# EAGLE board untitled (EAGLE 9.0.1)
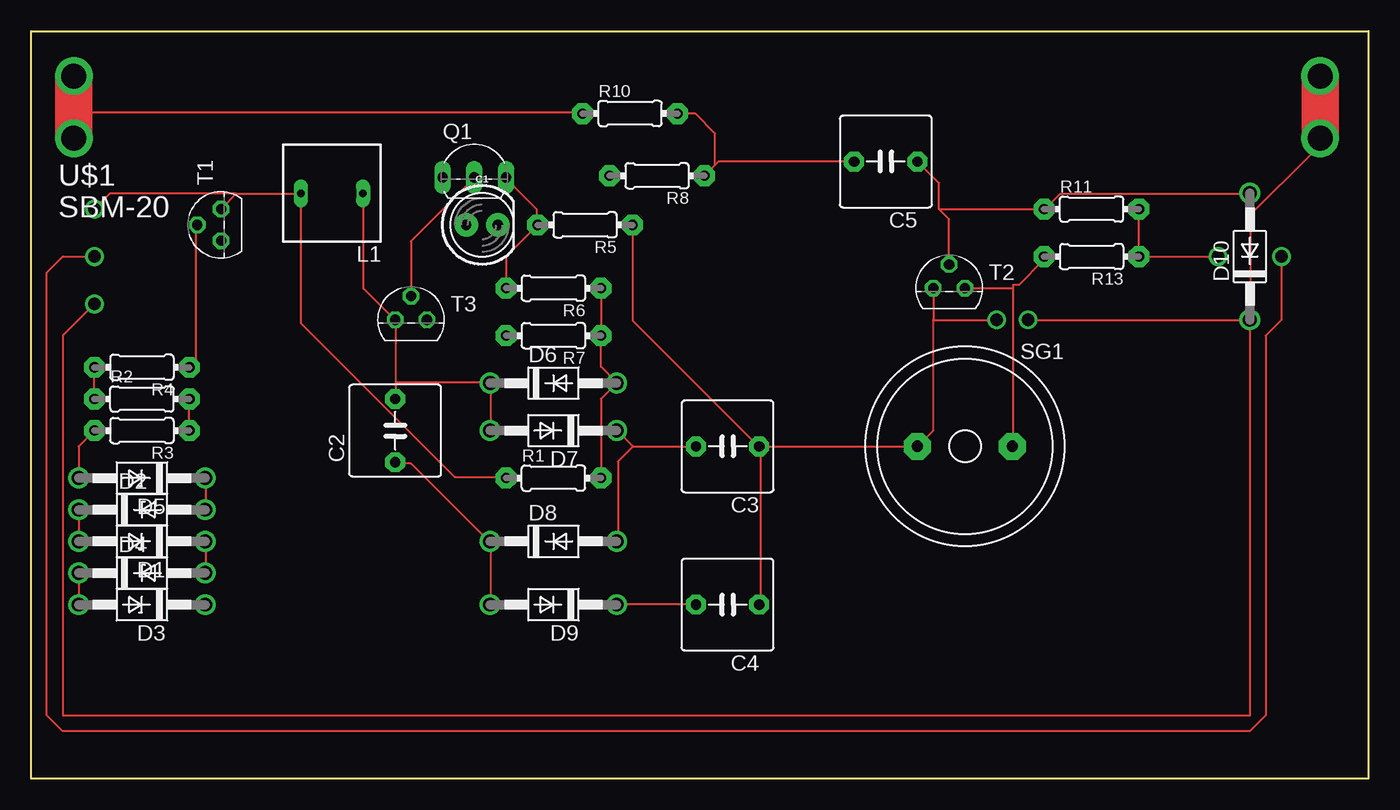
[diagram p0: board, top side]
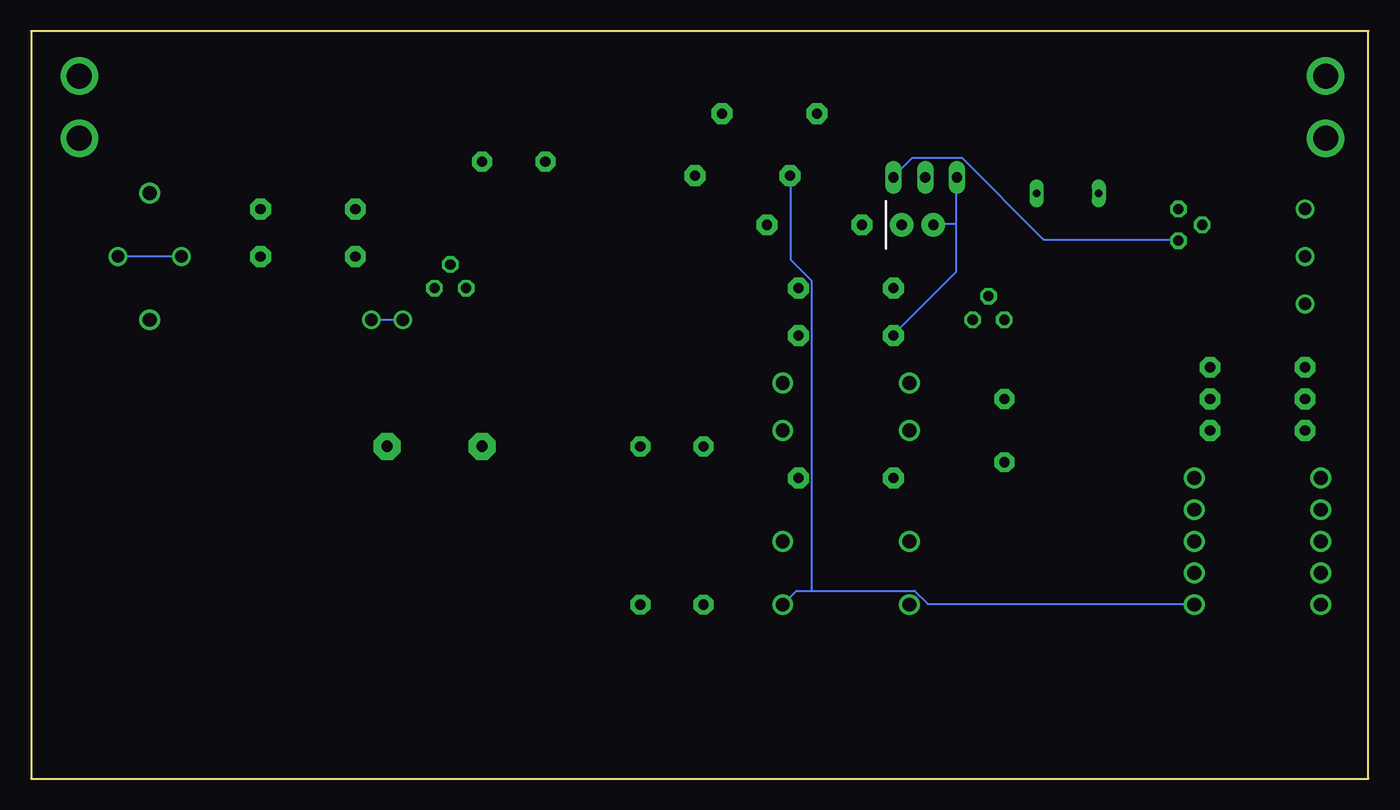
[diagram p1: board, bottom side, seen from below]

Size 107.3 x 60 mm. Coordinates in mm from the lower left corner, seen from the top.
Outline: 0,0 0,60 107.3,60 107.3,0 0,0
Copper layers (1*16): Top 0.035mm / dielectric 1.5mm / Bottom 0.035mm
Design rules "default": minimum track width 6mil, minimum drill 0.35mm, track to track 6mil, track to pad 6mil, pad to pad 6mil, via to via 6mil, smd to smd 6mil, copper to edge 40mil, drill to drill 6mil, minimum pad ring 10mil, minimum via ring 8mil, stop-mask expansion 4mil, vias tented up to drill 0mil, thermal gap 10mil

## Footprints (pad centres in the part's own frame; a part is rotated, then mirrored left to right if it is on the bottom)
LED_5MM = drill 0.813 pad 1.88: A -1.27,0; K 1.27,0
C5B7.2 = drill 0.813 pad 1.6 octagon: 1 -2.54,0; 2 2.54,0
DO41Z10 = drill 1.118: A 5.08,0; C -5.08,0
DO41-10 = drill 1.118: A 5.08,0; C -5.08,0
SD8 = drill 0.6 long: 1 -2.5,0; 2 2.5,0
TO92-BCE = drill 0.813 long: B 2.54,0; C 0,0; E -2.54,0
0204/7 = drill 0.813 pad 1.676 octagon: 1 -3.81,0; 2 3.81,0
F/QMB = drill 0.914 pad 2.159 octagon: + 3.81,0; - -3.81,0
TO92 = drill 0.813 octagon: 1 1.27,0; 2 0,1.905; 3 -1.27,0
SBM-20 = drill 2 pad 3: P$1 0,5; P$2 0,0; P$3 100,0; P$4 100,5

## Placement (x,y rotation side)
C1  [LED_5MM]  36.18,44.45 0 top
C2  [C5B7.2]  29.21,27.94 90 top
C3  [C5B7.2]  55.88,26.67 180 top
C4  [C5B7.2]  55.88,13.97 180 top
C5  [C5B7.2]  68.58,49.53 180 top
D1  1N4728  [DO41Z10]  8.89,19.05 180 top
D2  1N4728  [DO41Z10]  8.89,21.59 0 top
D3  1N4728  [DO41Z10]  8.89,13.97 180 top
D4  1N4728  [DO41Z10]  8.89,16.51 0 top
D5  1N4728  [DO41Z10]  8.89,24.13 180 top
D6  1N4004  [DO41-10]  41.91,31.75 0 top
D7  1N4004  [DO41-10]  41.91,27.94 180 top
D8  1N4004  [DO41-10]  41.91,19.05 0 top
D9  1N4004  [DO41-10]  41.91,13.97 180 top
D10  1N4004  [DO41-10]  97.79,41.91 90 top
L1  [SD8]  24.13,46.99 180 top
Q1  BC636  [TO92-BCE]  35.56,48.26 0 top
R1  [0204/7]  41.91,24.13 0 top
R2  [0204/7]  8.89,30.48 0 top
R3  [0204/7]  8.89,27.94 180 top
R4  [0204/7]  8.89,33.02 180 top
R5  [0204/7]  44.45,44.45 180 top
R6  [0204/7]  41.91,39.37 180 top
R7  [0204/7]  41.91,35.56 180 top
R8  [0204/7]  50.22,48.39 180 top
R10  [0204/7]  48.06,53.39 0 top
R11  [0204/7]  85.09,45.72 0 top
R13  [0204/7]  85.09,41.91 180 top
SG1  F/QMB  [F/QMB]  74.93,26.67 0 top
T1  2N3904  [TO92]  15.24,44.45 90 top
T2  2N3904  [TO92]  73.66,39.37 0 top
T3  BC547  [TO92]  30.48,36.83 0 top
U$1  SBM-20  [SBM-20]  3.43,51.4 0 top

## Library data of the parts
C1 = SparkFun-LED
C2-C5 = capacitor-wima
D1-D10 = diode
L1 = inductor-neosid; OC_FARNELL: unknown; OC_NEWARK: unknown
Q1 = transistor-pnp
R1-R8 R10 R11 R13 = adafruit
SG1 = buzzer; OC_FARNELL: unknown; OC_NEWARK: unknown
T1 T2 = transistor
T3 = transistor-neu-to92
U$1 = sbm-20

## Nets
+5V: R11.2 R13.1
GND: C3.1 C4.1 D10.C R5.1 SG1.- T2.3 U$1.P$3 U$1.P$4
N$1: R2.2 R3.1
N$2: R2.1 R4.2
N$3: D5.A R3.2
N$4: Q1.B R5.2 R6.2 T1.3
N$5: R4.1 T1.2
N$6: D1.A D2.C
N$7: D1.C D4.A
N$8: D2.A D5.C
N$9: D3.A D4.C
N$10: C1.A Q1.E R7.2
N$11: D6.A R1.2 R6.1 R7.1
N$12: C2.2 D6.C D7.A L1.1 T3.3
N$13: Q1.C T3.2
N$14: C3.2 D7.C D8.A
N$15: C2.1 D8.C D9.A
N$16: C4.2 D3.C D9.C R8.2
N$17: C5.2 R8.1 R10.2
N$18: C5.1 D10.A R11.1 T2.2
N$19: R10.1 U$1.P$1 U$1.P$2
SIGNAL: R13.2 SG1.+ T2.1
VCC: L1.2 R1.1 T1.1

## Tracks (layer width: path | path; a pad name or v marks a point on that pad's centre or on a via)
+5V  (via drill 1)
  Top 0.152: R11.2 88.85,45.72 88.85,41.91 R13.1 v95.25,41.91 | v100.33,41.91 100.33,36.83 99.06,35.56 99.06,5.08 97.79,3.81 2.54,3.81 1.27,5.08 1.27,40.64 2.54,41.91 v5.08,41.91
  Bottom 0.152: v95.25,41.91 v100.33,41.91
GND  (via drill 1)
  Top 0.152: D10.C 97.84,36.88 97.84,45.26 102.72,50.14 U$1.P$3 | 71.32,26.82 71.17,26.67 SG1.- | 58.52,26.67 58.52,14.02 C4.1 | R5.1 48.31,44.35 48.31,36.73 58.37,26.67 C3.1 58.52,26.67 | 58.52,26.67 SG1.- | D10.C 97.79,5.08 2.54,5.08 2.54,35.56 v5.08,38.1 | T2.3 72.39,36.83 | 72.39,36.83 v77.47,36.83 | v80.01,36.83 D10.C | SG1.- 72.39,27.94 72.39,36.83
  Top 3: U$1.P$3 U$1.P$4
  Bottom 0.152: 97.69,36.88 D10.C | v77.47,36.83 v80.01,36.83
N$1
  Top 0.152: R3.1 12.65,28.04 12.65,30.48 R2.2
N$2
  Top 0.152: R2.1 5.03,30.48 5.03,32.92 R4.2
N$3
  Top 0.152: D5.A 3.81,26.67 R3.2
N$4
  Top 0.152: R6.2 38.1,41.91 R5.2 40.54,44.5 40.54,45.72 38.1,48.16 Q1.B
  Bottom 0.152: T1.3 15.24,43.28 26.06,43.28 32.61,49.84 36.58,49.84 38.1,48.31 Q1.B
N$5
  Top 0.152: T1.2 13.26,44.35 13.26,33.53 12.8,33.07 R4.1
N$6
  Top 0.152: D2.C D1.A
N$7
  Top 0.152: D4.A 14.02,16.61 14.02,19.05 D1.C
N$8
  Top 0.152: D2.A 14.02,21.64 14.02,24.08 D5.C
N$9
  Top 0.152: D4.C D3.A
N$10
  Bottom 0.152: 33.07,44.5 33.07,40.69 38.1,35.66 R7.2 | 33.07,44.5 33.07,48.16 Q1.E | 33.07,44.5 34.9,44.5 C1.A
N$11
  Top 0.152: R6.1 R7.1 45.72,33.07 46.94,31.85 D6.A 45.72,30.48 R1.2
N$12
  Top 0.152: D7.A 36.88,28.04 36.88,31.7 D6.C 36.73,31.85 29.26,31.85 | L1.1 26.67,46.94 26.67,39.32 29.11,36.88 T3.3 29.26,36.73 29.26,31.85 | 29.26,31.85 29.26,30.48 C2.2
N$13
  Top 0.152: T3.2 30.48,43.13 35.51,48.16 Q1.C
N$14
  Top 0.152: 48.31,26.67 C3.2 | 48.31,26.67 47.09,27.89 D7.C | 48.31,26.67 47.09,25.45 47.09,19.05 D8.A
N$15
  Top 0.152: C2.1 29.26,25.3 30.48,25.3 36.73,19.05 D8.C 36.88,19.05 36.88,14.02 D9.A
N$16
  Top 0.152: C4.2 53.34,14.02 47.09,14.02 D9.C
  Bottom 0.152: 44.65,15.09 45.87,15.09 D9.C | 44.65,15.09 36.42,15.09 35.36,14.02 14.02,14.02 D3.C | 44.65,15.09 44.65,39.93 46.33,41.6 46.33,48.31 R8.2
N$17
  Top 0.152: C5.2 55.17,49.53 54.89,49.25 | 54.89,49.25 R8.1 | 54.89,49.25 54.89,51.79 53.29,53.39 R10.2
N$18
  Top 0.152: 72.85,45.72 R11.1 81.38,45.72 82.6,46.94 97.69,46.94 D10.A | T2.2 73.66,44.91 72.85,45.72 | 72.85,45.72 72.85,47.8 C5.1
N$19
  Top 0.152: 3.43,56 U$1.P$1 | 3.43,53.49 44.2,53.49 R10.1
  Top 3: U$1.P$2 3.43,53.49 3.43,56
SIGNAL
  Top 0.152: 78.79,39.37 78.79,39.62 79.25,39.62 81.23,41.6 81.23,41.91 R13.2 | 78.79,39.37 78.79,26.67 SG1.+ | T2.1 78.79,39.37
VCC  (via drill 1)
  Top 0.152: 16.46,46.94 21.49,46.94 L1.2 21.64,46.94 21.64,36.58 33.98,24.23 38.1,24.23 R1.1 | T1.1 16.46,46.94 | v5.08,45.72 6.3,46.94 16.46,46.94